# Altium PCB Controller V1.PcbDoc
Units mm, origin at the board's own origin, x right, y up, seen from the top; angles counter-clockwise.
Board outline 83.98 x 84 mm, 6 copper layers (TOP, 5V, VS, SIGNALS, GND, BOTTOM), stack 1.597 mm thick; 43 components, 112 nets, 302 pads, 3 vias.
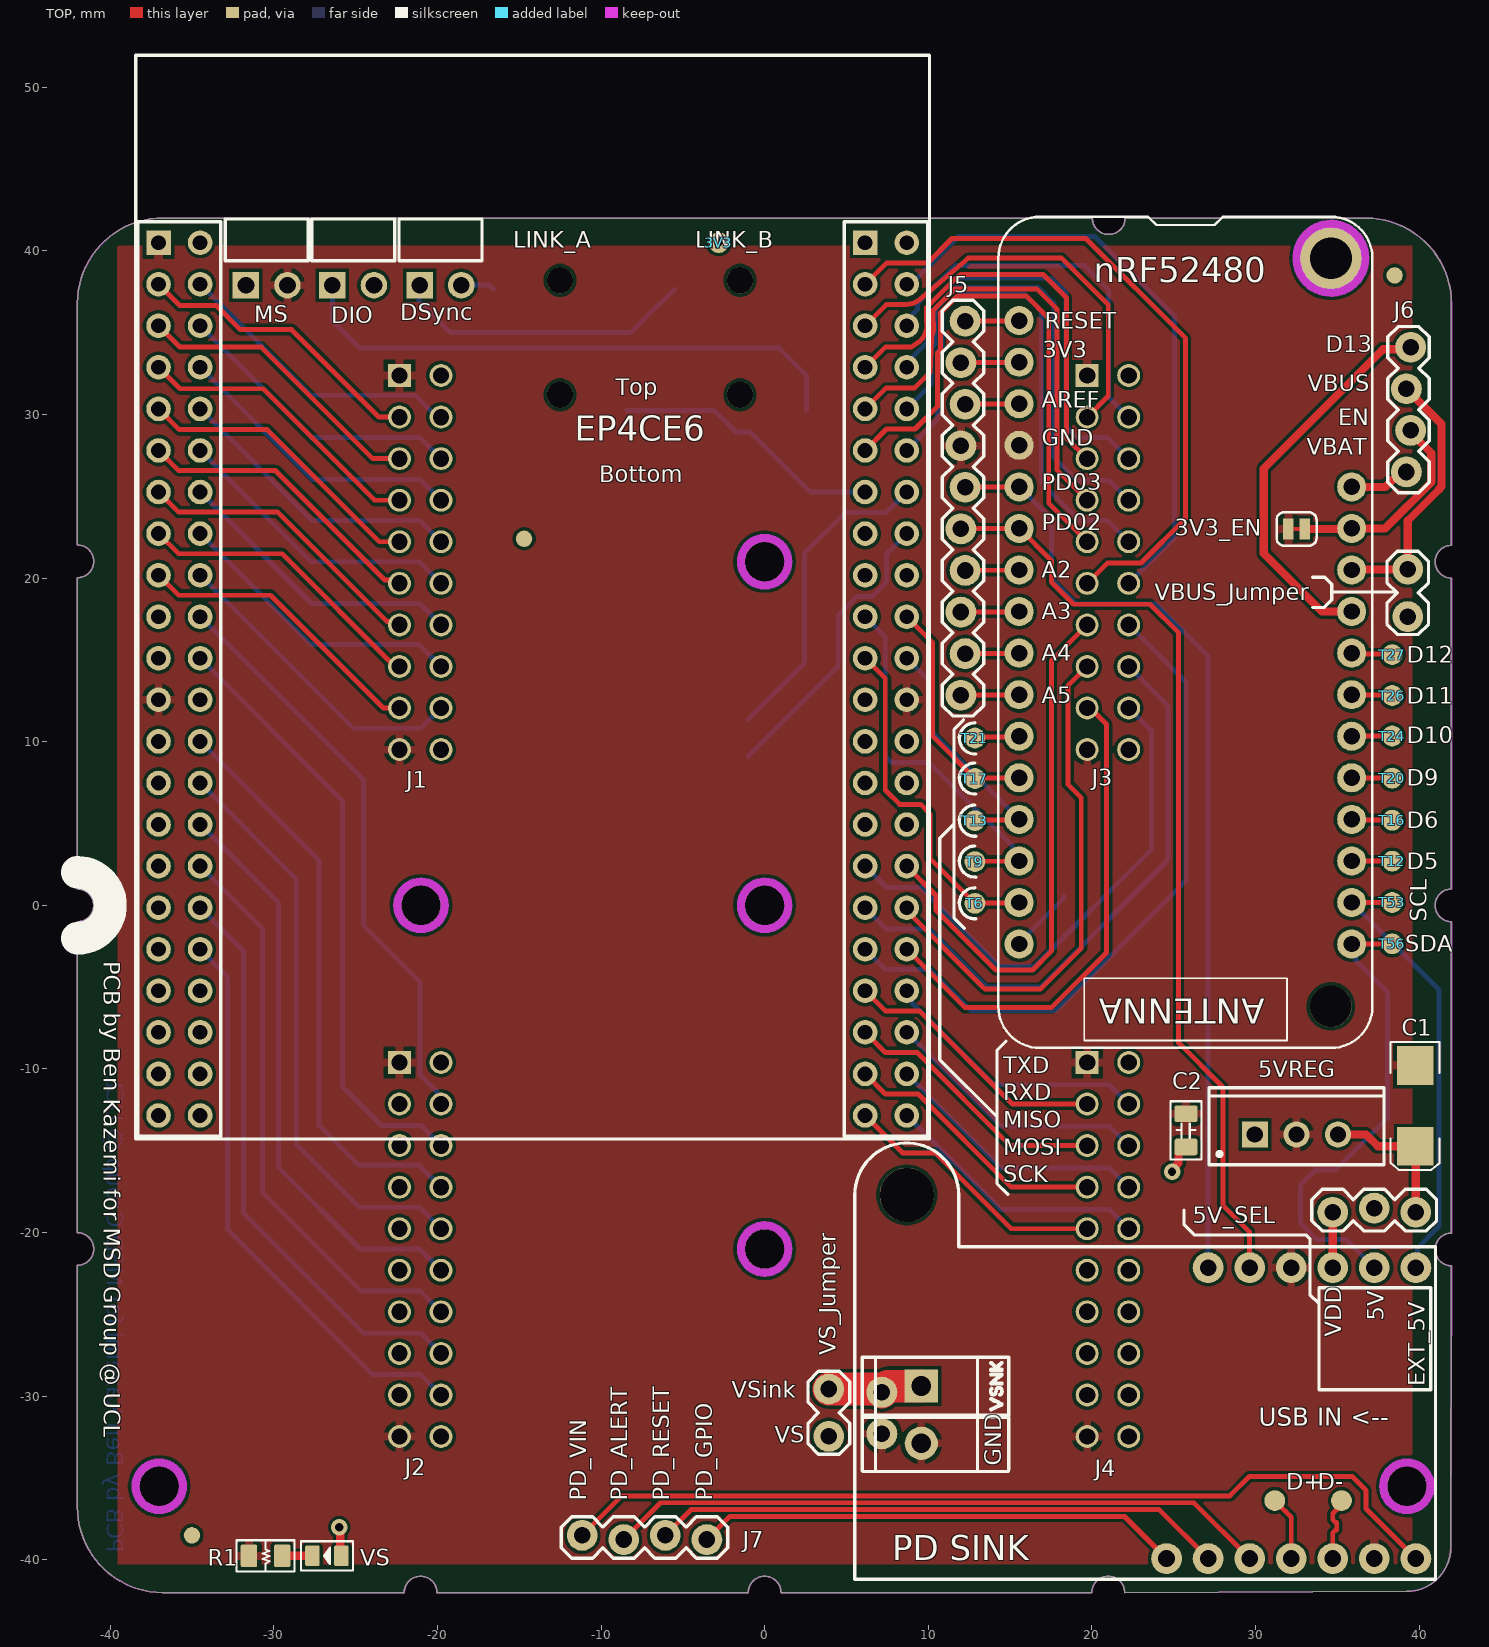
[diagram p0: TOP view]
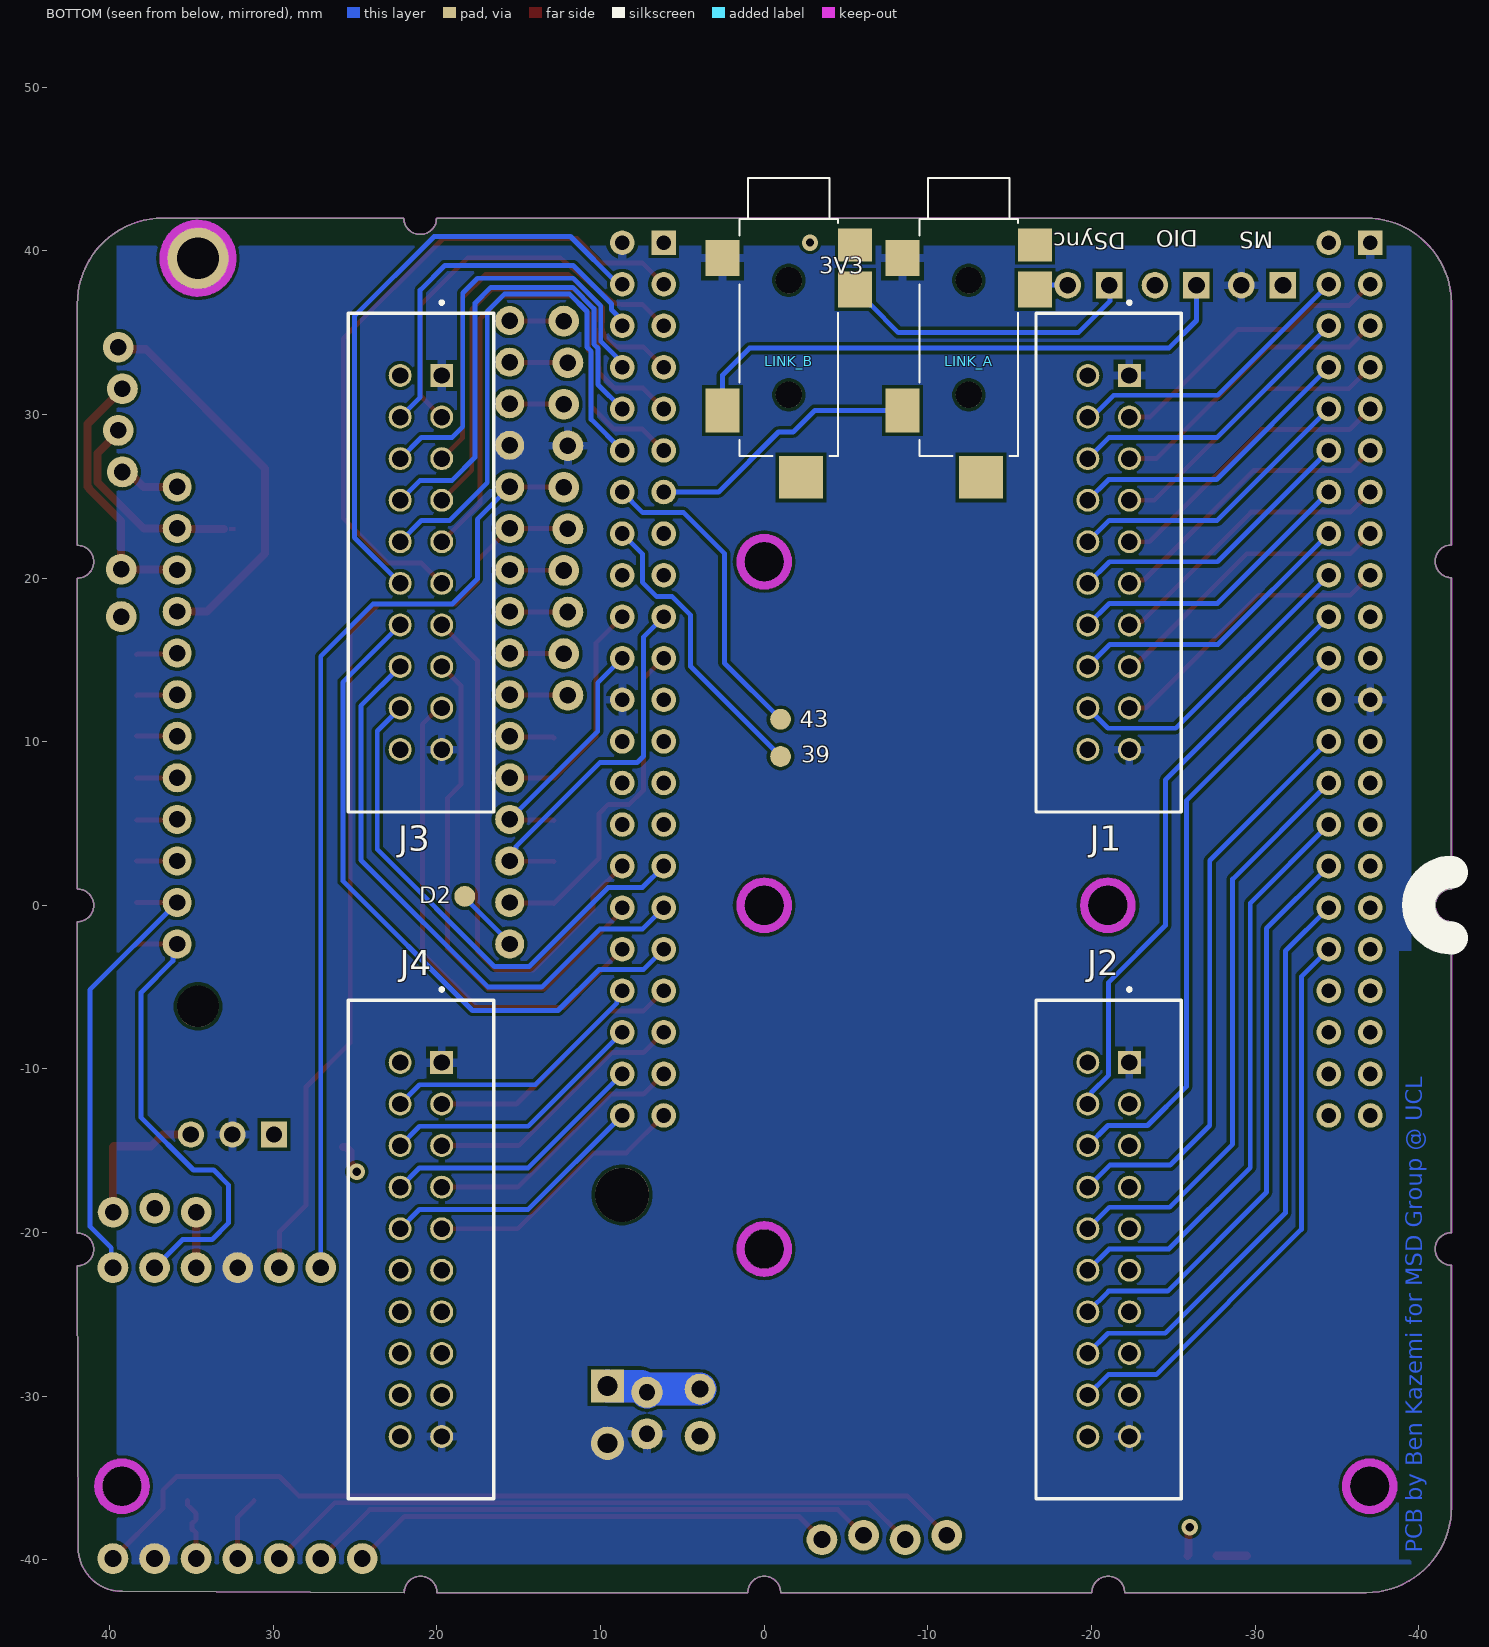
[diagram p1: BOTTOM view, seen from below]
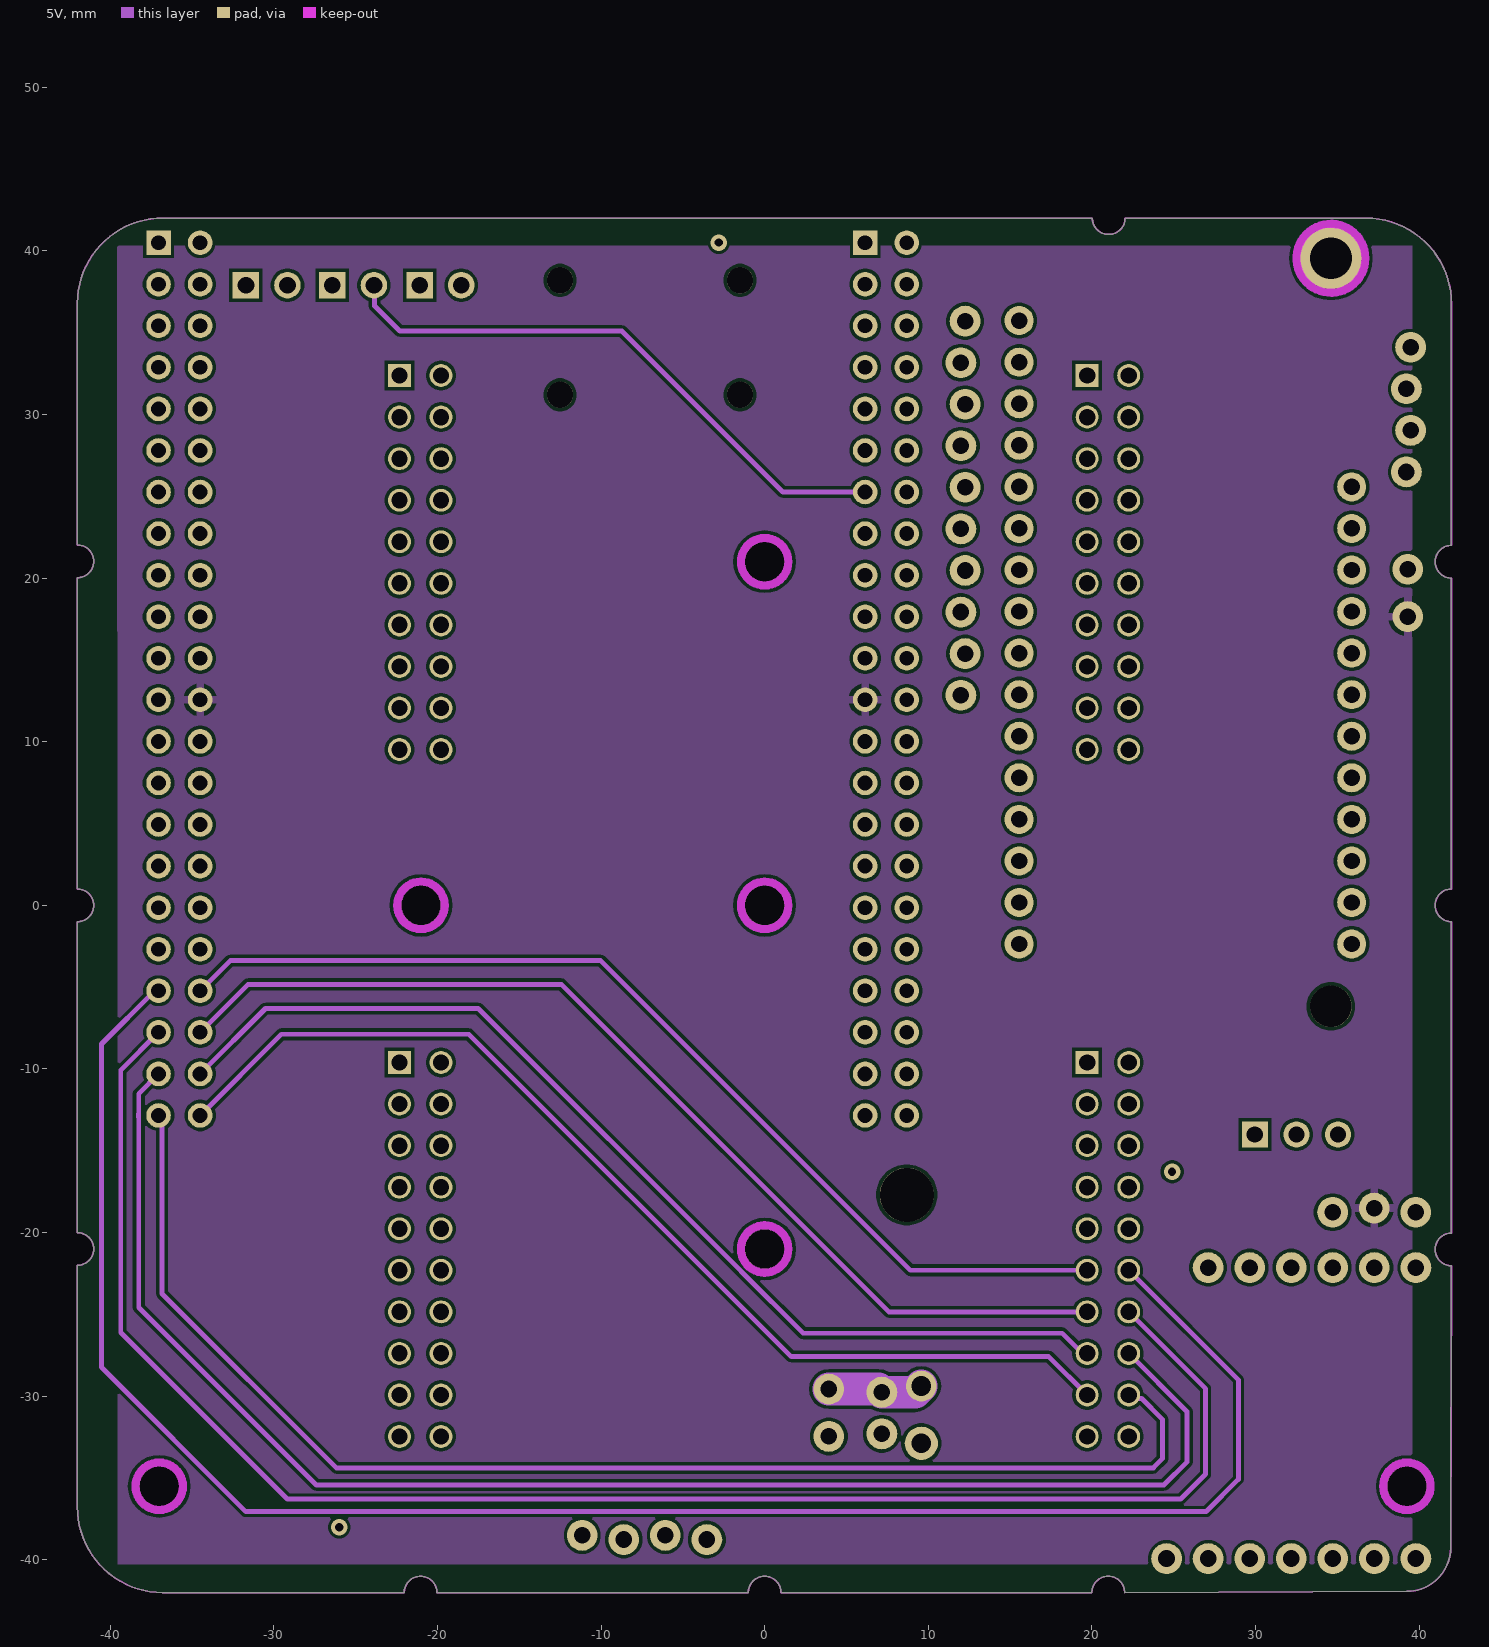
[diagram p2: 5V]
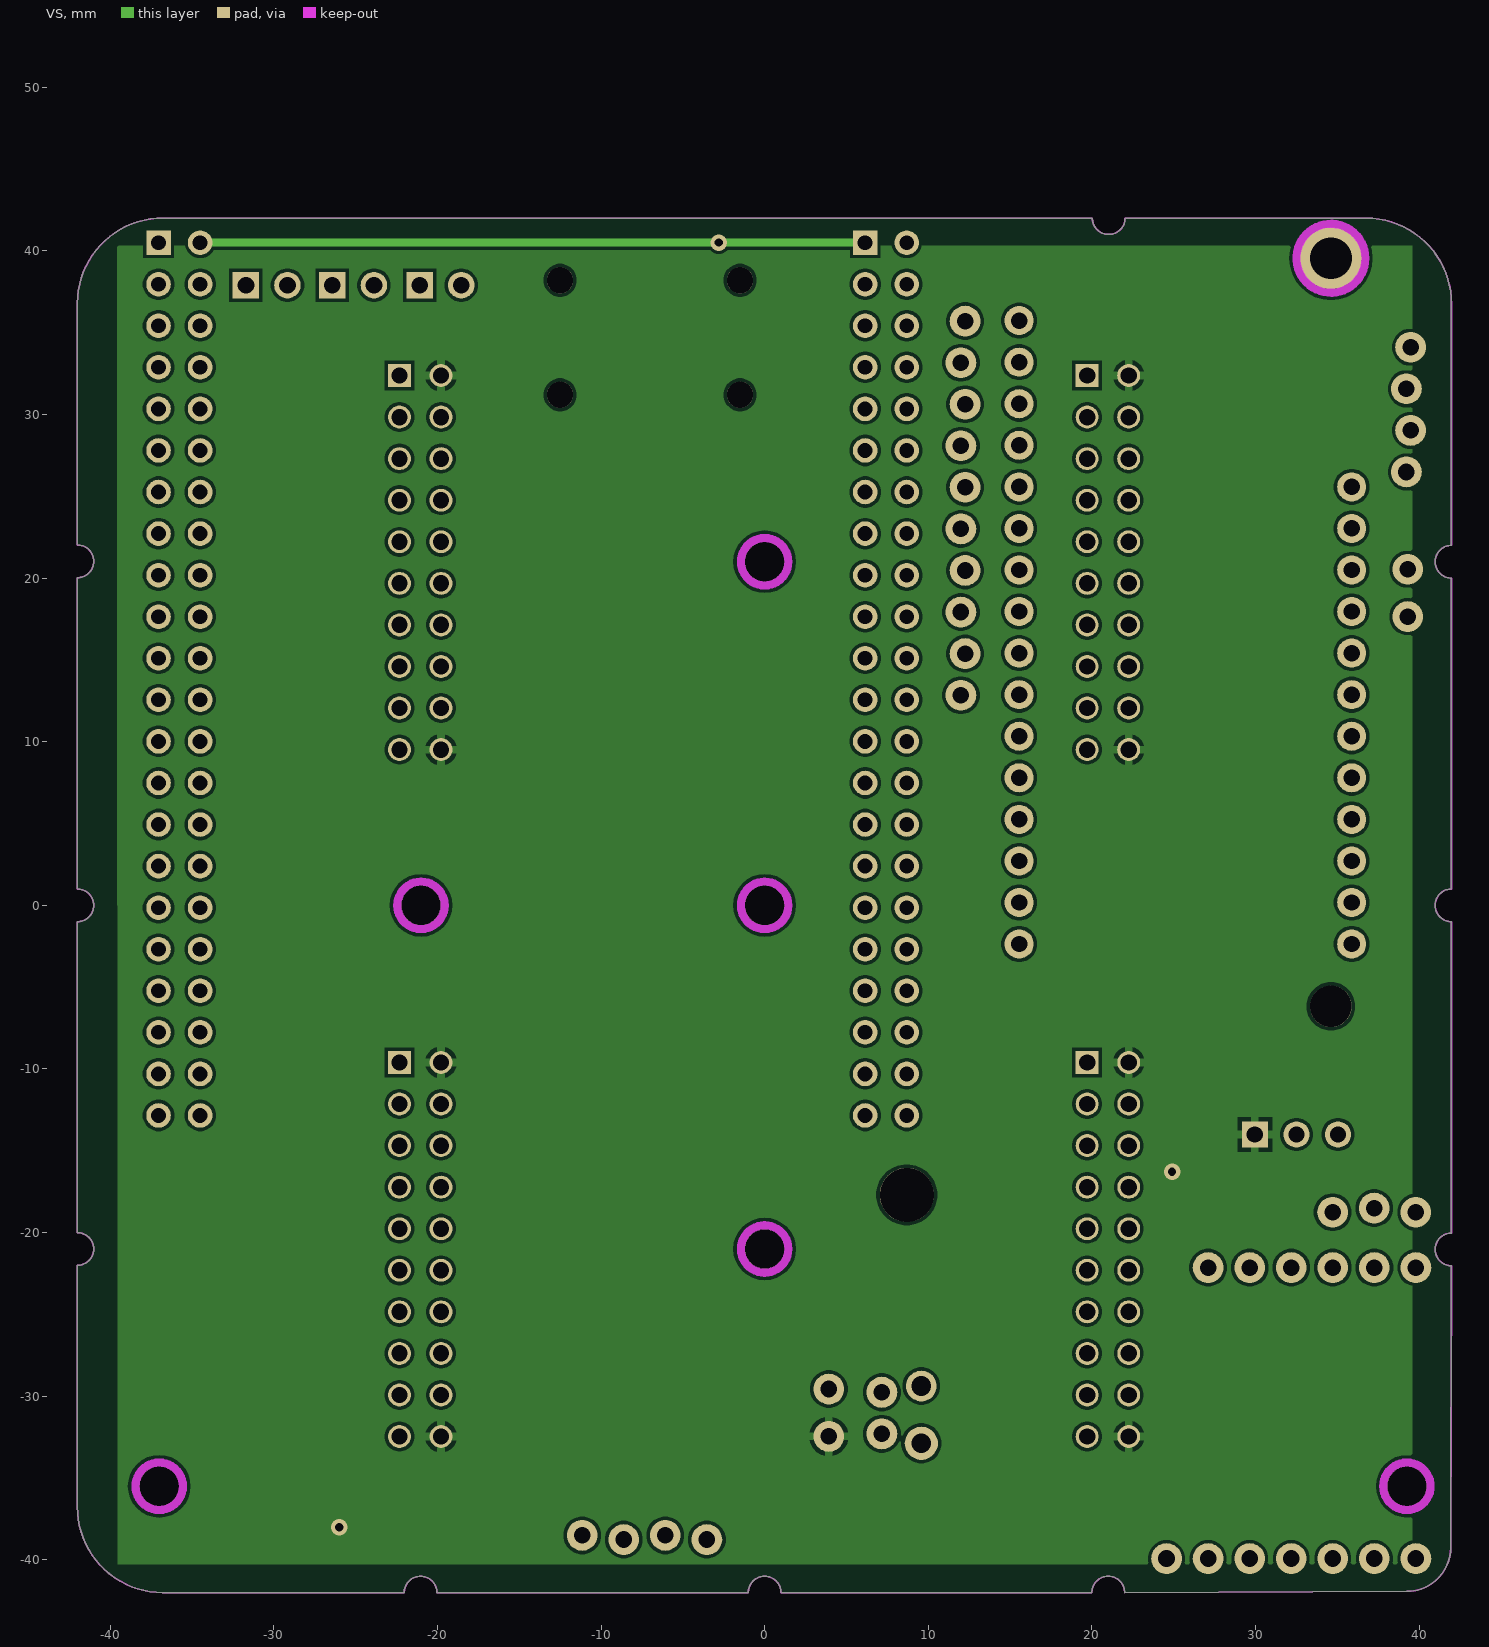
[diagram p3: VS]
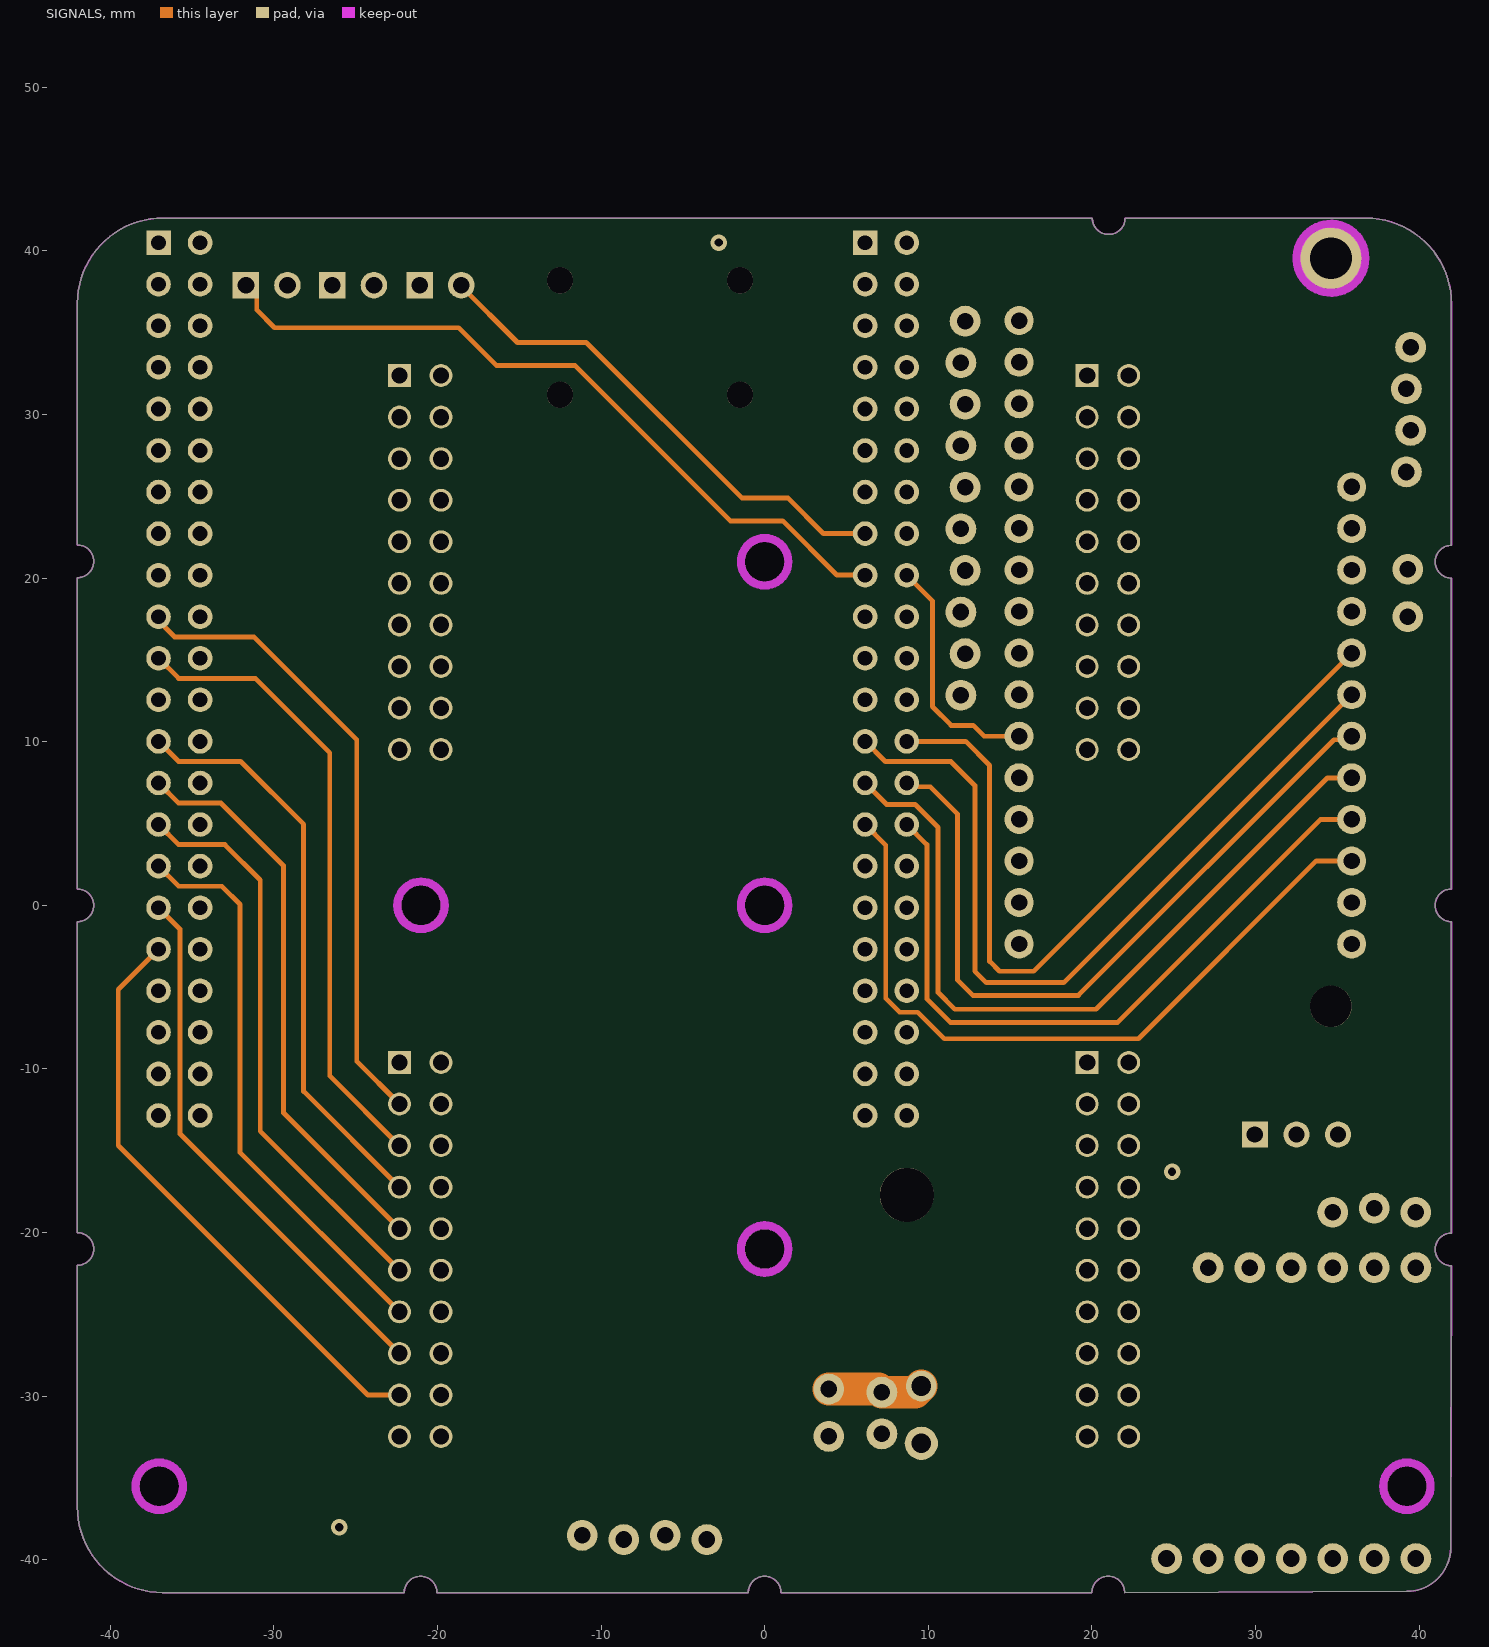
[diagram p4: SIGNALS]
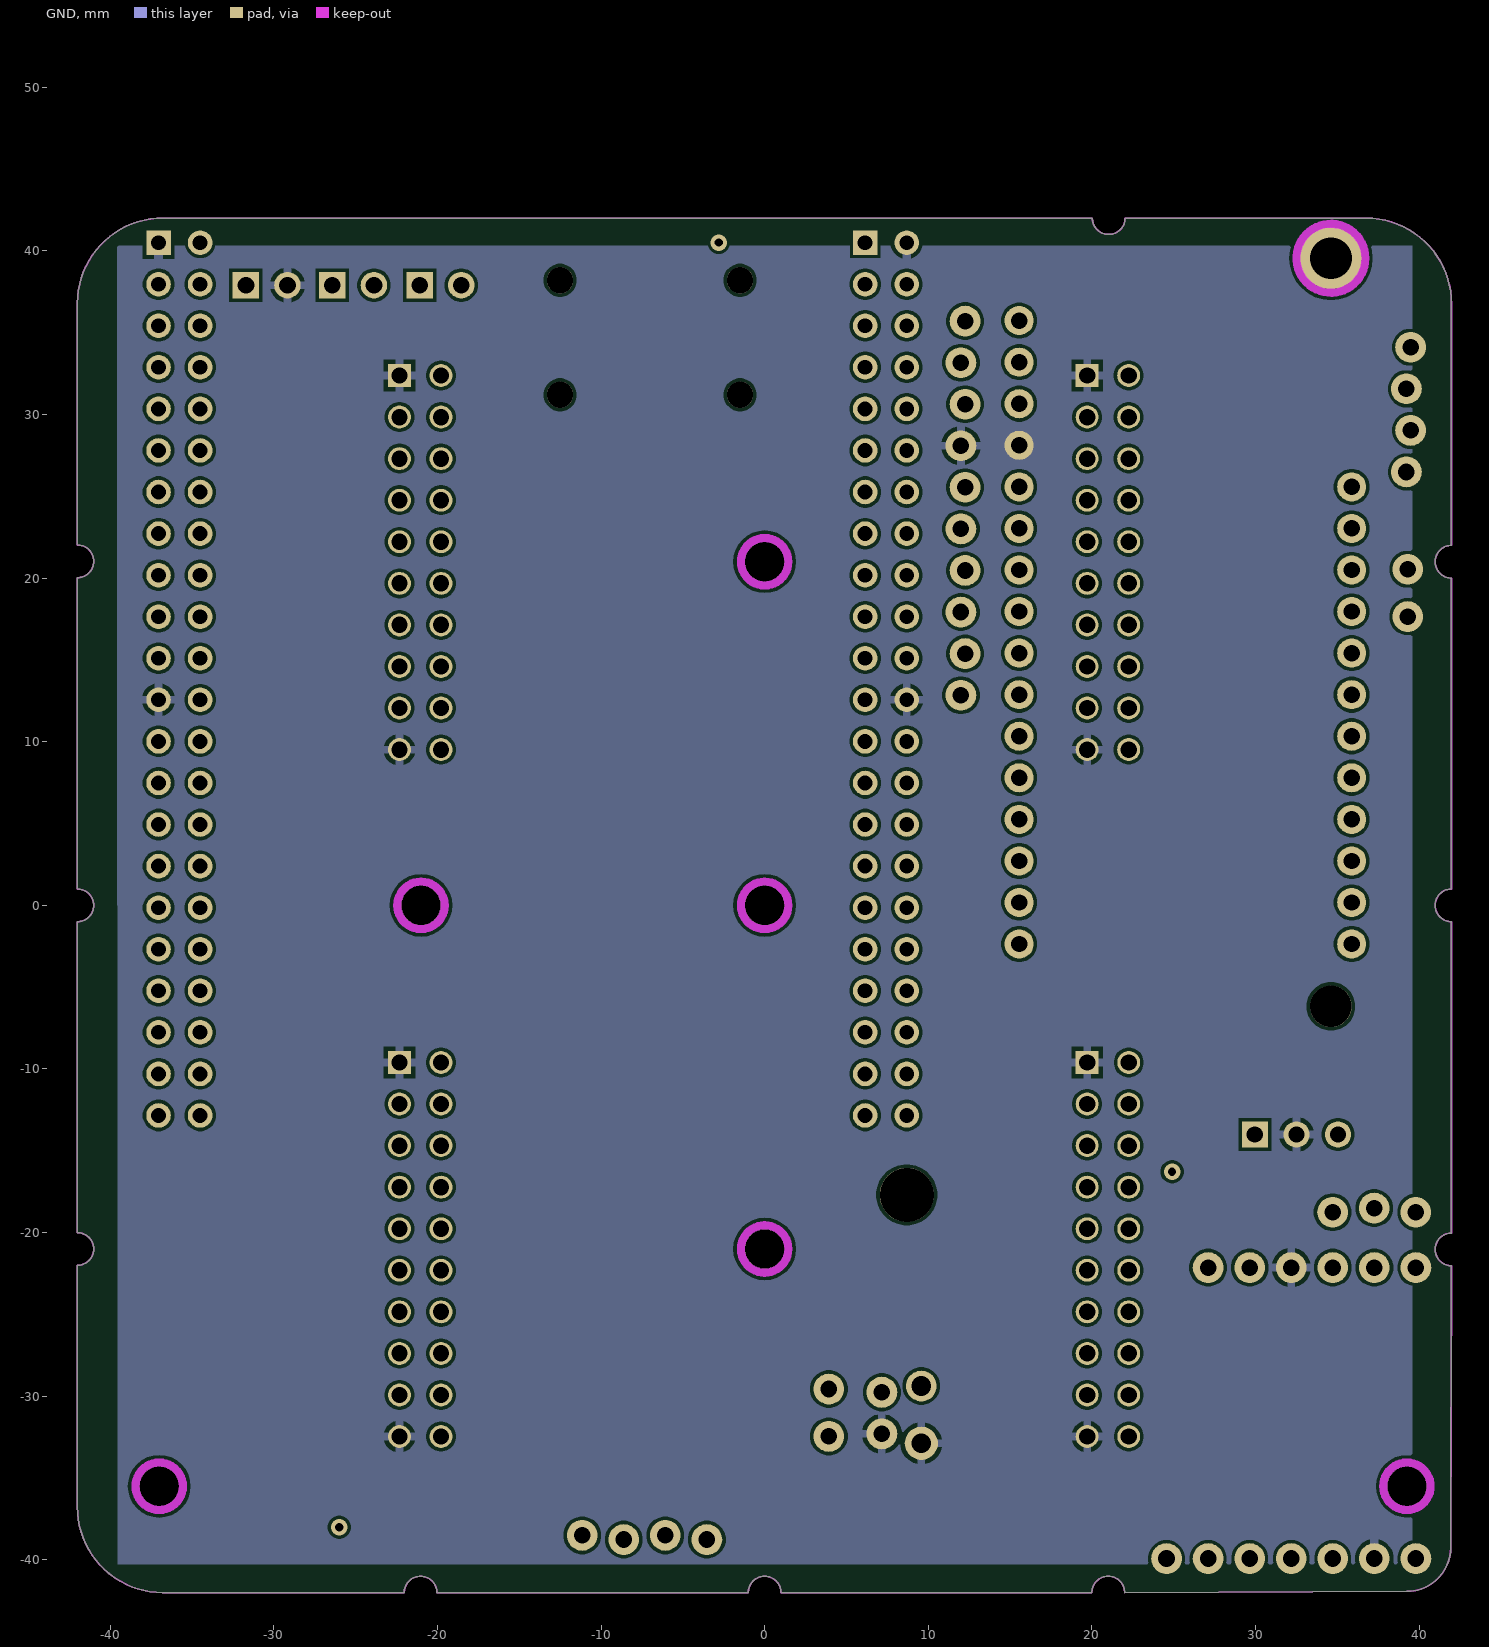
[diagram p5: GND]

## Layer stack, top to bottom
Top Mask: solder mask 0.015, Solder Resist, Dk 3.8
TOP: signal copper 0.035
Dielectric 1: prepreg 0.1, 2313, Dk 4.05
5V: signal copper 0.0175
Core 1: core 0.565, FR-4, Dk 4.5
VS: signal copper 0.0175
Dielectric 2: prepreg 0.127, 2116, Dk 4.25
SIGNALS: signal copper 0.0175
Core 2: core 0.565, FR-4, Dk 4.5
GND: signal copper 0.0175
Dielectric 3: prepreg 0.1, 2313, Dk 4.05
BOTTOM: signal copper 0.035
Bottom Mask: solder mask 0.015, Solder Resist, Dk 3.8

## Board outline
-42,-36.75 -42,-22 ccw(c-42,-21) -42,-20 -42,-1 ccw(c-42,0) -42,1 -42,20.025 ccw(c-42,21.025) -42,22.025 -42,36.775 -42,36.8 cw(c-36.775,36.775) -36.75,42 20.025,42 ccw(c21.025,42) 22.025,42 36.775,42 cw(c36.75,36.775) 41.975,36.75 41.975,22 ccw(c41.975,21) 41.975,20 41.975,1 ccw(c41.975,0) 41.975,-1 41.975,-20.025 ccw(c41.975,-21.025) 41.975,-22.025 41.927,-39.256 cw(c39.245,-39.243) 39.233,-41.925 22,-42 ccw(c21,-42) 20,-42 1,-42 ccw(c0,-42) -1,-42 -20.025,-42 ccw(c-21.025,-42) -22.025,-42 -36.775,-42 -36.8,-42 cw(c-36.775,-36.775)

## Design rules (kind name [scope] priority, off if disabled: settings)
BoardOutlineClearance [All] p1: gap=0.2 ignorepadtopadclearanceinfootprint=FALSE
Clearance [All] p1: gap=0.2 ignorepadtopadclearanceinfootprint=FALSE except(0.12: Arc-Arc Arc-Track Track-Track; 0.127: Arc-SMDPad Track-SMDPad SMDPad-SMDPad; 0.254: Arc-Via Arc-Text Track-Via Track-Text SMDPad-Via SMDPad-Text THPad-Via THPad-Text Via-Via Via-Text Fill-Text Poly-Text Region-Text Text-Text; 0.3: THPad-THPad; 0.33: Arc-THPad Track-THPad SMDPad-THPad)
HoleSize [All] p1: absolutevalues=TRUE maxlimit=6.3 minlimit=0.2 maxpercent=80.000 minpercent=20.000
MinimumAnnularRing [All] p1: minimumring=0.2
PlaneClearance [All] p1: clearance=0.5
PlaneConnect [All] p1: planeconnectstyle=Relief reliefexpansion=0.5 reliefentries=4 reliefconductorwidth=0.254 reliefairgap=0.254
PolygonConnect PolygonConnect_1 [All] p1: thpad.connectstyle=Relief thpad.reliefconductorwidth=0.5 thpad.reliefentries=4 thpad.polygonreliefangle="90 Angle" thpad.airgapwidth=0.254 smdpad.connectstyle=Relief smdpad.reliefconductorwidth=0.5 smdpad.reliefentries=4 smdpad.polygonreliefangle="90 Angle" smdpad.airgapwidth=0.254 via.connectstyle=Direct via.reliefconductorwidth=0.508 via.reliefentries=4 via.polygonreliefangle="90 Angle" via.airgapwidth=0.254
RoutingCorners [All] p1: cornerstyle=Round minsetback=2.54 maxsetback=2.54
RoutingVias [All] p1: holewidth=0.5 width=1 viastyle="Through Hole" minholewidth=0.2 minwidth=0.45 maxholewidth=1 maxwidth=2
SilkToSilkClearance [All] p1 off: silktosilkclearance=0.1
SilkToSolderMaskClearance [IsPad] p1 off: minsilkscreentomaskgap=0.1 clearancetoexposedcopper=TRUE
SolderMaskExpansion [All] p1: expansion=0.1 istentingtop=FALSE
Width [All] p1: maxlimit=2.54 minlimit=0.09 preferedwidth=0.3
24 further rules are at their usual default settings.

## Components (designator, comment, footprint, x,y, rotation, side; value= is the part's Value field where it differs from the comment)
3V3 "TEST-POINT3X5" PAD.03X.05 -2.8,40.5 r90 top
3V3_EN "Normally closed trace jumper    This jumper has a trace between two pads so it's normally closed (NC). Use a razor knife to open the connection. For best results follow the IPC guidelines for cutting traces: Cutout at least 0.063 mm (0.005 in).  Remove all loose material to clean up the cut area.  Seal the cut with an approved epoxy.       Reapply solder to reclose the connection." SMT-JUMPER_2_NC_TRACE_SILK 32.508,23 r0 top net-tie
5V_SEL "Jumper to short the 5V source" "1X03_LOCK - header" 39.79,-18.627 r180 top
5VREG "OKI-78SR-5" OOKA-78SR 32.5,-14 r0 top
39 "TEST-POINT3X5" PAD.03X.05 -1,9.1 r180 bottom
43 "TEST-POINT3X5" PAD.03X.05 -1,11.375 r180 bottom
C1 "GRM32ER71A476ME15L" EIA6032-NOM 39.75,-12.25 r270 top
C2 "0.33uF" CAP0805 25.75,-13.75 r180 top
D2 "TEST-POINT3X5" PAD.03X.05 18.3,0.55 r180 bottom
D+ "TEST-POINT3X5" PAD.03X.05 31.175,-36.375 r0 top
D- "TEST-POINT3X5" PAD.03X.05 35.25,-36.375 r0 top
DIO "TSW-102-09-G-S-RA" SAMTEC_TSW-102-09-G-S-RA -26.415,37.9 r180 top
DSync "TSW-102-09-G-S-RA" SAMTEC_TSW-102-09-G-S-RA -21.08,37.9 r180 top (schematic designator D_Sync)
EP4CE6 "Waveshare FPGA" "EP4CE6 WAVESHARE FPGA" -37.04,40.5 r270 top locked
J1 "TSSH-110-01-L-D" SAMTEC_TSSH-110-01-L-D -22.317,32.379 r270 bottom locked
J2 "TSSH-110-01-L-D" SAMTEC_TSSH-110-01-L-D -22.317,-9.601 r270 bottom
J3 "TSSH-110-01-L-D" SAMTEC_TSSH-110-01-L-D 19.708,32.379 r270 bottom locked
J4 "TSSH-110-01-L-D" SAMTEC_TSSH-110-01-L-D 19.71,-9.601 r270 bottom locked
J5 "" "1X10 _ LOCK - header" 12.123,35.705 r270 top
J6 "Pulled out pins" "1X04_LOCK - header" 39.348,26.485 r90 top
J7 "Pulled out pins" "1X04_LOCK - header" -3.53,-38.629 r180 top
LINK_A "35RASMT4BHNTRX" SWITCHCRAFT_35RASMT4BHNTRX -12.5,34.7 r270 bottom
LINK_B "35RASMT4BHNTRX" SWITCHCRAFT_35RASMT4BHNTRX -1.5,34.7 r270 bottom
MS "TSW-102-09-G-S-RA" SAMTEC_TSW-102-09-G-S-RA -31.7,37.9 r180 top
nRF52480 "Adafruit Feather nRF52480" "FEATHER BLE NRF52480" 16.825,39.545 r270 top
"PD SINK" "Sparkfun STUSB4500" "SPARKFUN STUSB4500" 39.801,-22.136 r180 top
R1 "3K BOURNS CRT0805-BY-3001ELF" RES-0805 -30.5,-39.75 r270 top
T6 "TEST-POINT3X5" PAD.03X.05 12.85,0.125 r90 top
T9 "TEST-POINT3X5" PAD.03X.05 12.85,2.675 r90 top
T12 "TEST-POINT3X5" PAD.03X.05 38.35,2.7 r180 top
T13 "TEST-POINT3X5" PAD.03X.05 12.85,5.175 r180 top
T16 "TEST-POINT3X5" PAD.03X.05 38.35,5.2 r180 top
T17 "TEST-POINT3X5" PAD.03X.05 12.85,7.75 r180 top
T20 "TEST-POINT3X5" PAD.03X.05 38.35,7.775 r180 top
T21 "TEST-POINT3X5" PAD.03X.05 12.85,10.225 r180 top
T24 "TEST-POINT3X5" PAD.03X.05 38.35,10.35 r180 top
T26 "TEST-POINT3X5" PAD.03X.05 38.35,12.825 r90 top
T27 "TEST-POINT3X5" PAD.03X.05 38.35,15.325 r180 top
T53 "TEST-POINT3X5" PAD.03X.05 38.35,0.175 r180 top
T56 "TEST-POINT3X5" PAD.03X.05 38.35,-2.35 r180 top
VBUS_Jumper "Short to connect  5V to VBUS of feather" 1X02_LOCK_ 39.3,17.825 r90 top
VS "Red WURTH 150080RS75000" "LED-0805 - RED" -26.75,-39.75 r180 top
VS_Jumper "Short to connect VS to Vsink, open to add filters" 1X02_LOCK_ 3.925,-29.735 r270 top

## Footprints (in the part's own frame and the unit in brackets; to place one, negate y for a bottom-side part, rotate by r counter-clockwise, add the part's x,y. Pads: shape width x height; smd on the part's side, far side on the other; paste and mask are expansions set on the pad)
1X02_LOCK_ [mil]
  round 74 hole 40: 1(-7,0) 2(107,0)
  silkscreen extent -50,-50 150,50, body extent -50,-49 150,49, height 241
"1X03_LOCK - header" [mil]
  round 74 hole 40: 1(0,5) 2(100,-5) 3(200,5)
  silkscreen extent -50,-50 250,50, body extent -50,-50 250,48, height 330
"1X04_LOCK - header" [mil]
  round 74 hole 40: 1(0,5) 2(100,-5) 3(200,5) 4(300,-5)
  silkscreen extent -50,-50 350,50, body extent -47,-51 353,47, height 122
"1X10 _ LOCK - header" [mil]
  round 74 hole 40: 1(0,5) 2(100,-5) 3(200,5) 4(300,-5) 5(400,5) 6(500,-5) 7(600,5) 8(700,-5) 9(800,5) 10(900,-5)
  silkscreen extent -50,-50 950,50, body extent -50,-48 950,50, height 330
CAP0805 [mil]
  rrect25% 55x40 smd: 1(0,40) 2(0,-40)
  silkscreen extent -38,-70 38,70, body extent -25,-39 25,39, height 49
EIA6032-NOM [mm]
  rect 2.37x2.23 smd: A(2.47,0) C(-2.47,0)
  silkscreen extent -3.91,-1.5 3.91,1.5, body extent -3.12,-1.6 3.07,1.61, height 2.22
"EP4CE6 WAVESHARE FPGA" [mm]
  rect 1.5x1.5 hole 0.9: 1(0,0) 45(0,43.18)
  round 1.5 hole 0.9: 2(0,2.54) 3(2.54,0) 4(2.54,2.54) 5(5.08,0) 6(5.08,2.54) 7(7.62,0) 8(7.62,2.54) 9(10.16,0) 10(10.16,2.54) 11(12.7,0) 12(12.7,2.54) 13(15.24,0) 14(15.24,2.54) 15(17.78,0) 16(17.78,2.54) 17(20.32,0) 18(20.32,2.54) 19(22.86,0) 20(22.86,2.54) 21(25.4,0) 22(25.4,2.54) 23(27.94,0) 24(27.94,2.54) 25(30.48,0) 26(30.48,2.54) 27(33.02,0) 28(33.02,2.54) 29(35.56,0) 30(35.56,2.54) 31(38.1,0) 32(38.1,2.54) 33(40.64,0) 34(40.64,2.54) 35(43.18,0) 36(43.18,2.54) 37(45.72,0) 38(45.72,2.54) 39(48.26,0) 40(48.26,2.54) 41(50.8,0) 42(50.8,2.54) 43(53.34,0) 44(53.34,2.54) 46(0,45.72) 47(2.54,43.18) 48(2.54,45.72) 49(5.08,43.18) 50(5.08,45.72) 51(7.62,43.18) 52(7.62,45.72) 53(10.16,43.18) 54(10.16,45.72) 55(12.7,43.18) 56(12.7,45.72) 57(15.24,43.18) 58(15.24,45.72) 59(17.78,43.18) 60(17.78,45.72) 61(20.32,43.18) 62(20.32,45.72) 63(22.86,43.18) 64(22.86,45.72) 65(25.4,43.18) 66(25.4,45.72) 67(27.94,43.18) 68(27.94,45.72) 69(30.48,43.18) 70(30.48,45.72) 71(33.02,43.18) 72(33.02,45.72) 73(35.56,43.18) 74(35.56,45.72) 75(38.1,43.18) 76(38.1,45.72) 77(40.64,43.18) 78(40.64,45.72) 79(43.18,43.18) 80(43.18,45.72) 81(45.72,43.18) 82(45.72,45.72) 83(48.26,43.18) 84(48.26,45.72) 85(50.8,43.18) 86(50.8,45.72) 87(53.34,43.18) 88(53.34,45.72)
  silkscreen extent -11.44,-1.39 54.78,47.11, body extent -1.35,-1.35 54.56,46.99, height 8.65
"FEATHER BLE NRF52480" [mil]
  round 70 hole 39.37: 1(150,-50) 2(250,-50) 3(350,-50) 4(450,-50) 5(550,-50) 6(650,-50) 7(750,-50) 8(850,-50) 9(950,-50) 10(1050,-50) 11(1150,-50) 12(1250,-50) 13(1350,-50) 14(1450,-50) 15(1550,-50) 16(1650,-50) 17(1650,750) 18(1550,750) 19(1450,750) 20(1350,750) 21(1250,750) 22(1150,750) 23(1050,750) 24(950,750) 25(850,750) 26(750,750) 27(650,750) 28(550,750)
  round 149.61 hole 100.39 unplated: 2(0,700)
  round 100 hole 100 unplated: MH1(1800,700)
  silkscreen extent -100,-100 1900,800, body extent 91,-95 1711,799, height 335
"LED-0805 - RED" [mil]
  rrect25% 35x50 smd: +(-35,0) -(35,0)
  silkscreen extent -63,-35 63,35, body extent -39,-25 39,25, height 16
OOKA-78SR [mm] "TO, Thru-Hole, Vertical, Heatsink Mounted; 3 In-Line Leads; Pitch 2.54 mm"
  round 1.6 hole 1: GND(0,0) OUT(2.54,0)
  rect 1.6x1.6 hole 1: IN(-2.54,0)
  silkscreen extent -5.35,-1.85 5.35,2.85, body extent -5.21,-2.79 5.21,4.94, height 16.58
PAD.03X.05 [mm]
  rrect100% 1.27x1.27 smd paste-0.635: P$1(0,0)
RES-0805 [mil]
  rrect25% 55x40 smd: 1(0,40) 2(0,-40)
  silkscreen extent -38,-70 38,70, body extent -24,-40 26,38, height 24
SAMTEC_TSSH-110-01-L-D [mm]
  rect 1.4x1.4 hole 1: 01(0,0)
  round 1.4 hole 1: 02(0,-2.54) 03(2.54,0) 04(2.54,-2.54) 05(5.08,0) 06(5.08,-2.54) 07(7.62,0) 08(7.62,-2.54) 09(10.16,0) 10(10.16,-2.54) 11(12.7,0) 12(12.7,-2.54) 13(15.24,0) 14(15.24,-2.54) 15(17.78,0) 16(17.78,-2.54) 17(20.32,0) 18(20.32,-2.54) 19(22.86,0) 20(22.86,-2.54)
  silkscreen extent -4.56,-5.72 26.67,3.18, body extent -3.81,-5.72 26.67,3.18, height 8.89
SAMTEC_TSW-102-09-G-S-RA [mm]
  rect 1.62x1.62 hole 1.02: 01(0,0)
  round 1.62 hole 1.02: 02(-2.54,0)
  silkscreen extent -3.81,-4.04 1.27,-1.5, body extent -3.81,-9.91 1.27,0.32, height 3.27
SMT-JUMPER_2_NC_TRACE_SILK [mil]
  rect 25x50 smd paste-25: 1(-20,0) 2(20,0)
  TOP region: -8,-5 8,-5 8,5 -8,5
  silkscreen extent -48,-40 48,40
"SPARKFUN STUSB4500" [mil]
  round 74 hole 40: 1(0,0) 2(100,0) 3(200,0) 4(300,0) 5(400,0) 6(500,0) 7(0,700) 8(100,700) 9(200,700) 10(300,700) 11(400,700) 12(500,700) 13(600,700)
  round 80 hole 47.24: 8(1190,422.8)
  round 74.8 hole 39.37: 8(1285,400) 14(1285,300)
  rect 80x80 / inner round 73.91 / far side rect 80x80 hole 47.24: 14(1190,285)
  round 130 hole 130 unplated: MH1(1225,-175)
  silkscreen extent -47,-300 1350,750, body extent -60,-45 1333,747, height 335
SWITCHCRAFT_35RASMT4BHNTRX [mm]
  rect 2.2x2.1 smd: 1(-4.85,-4.05) 2(-2.95,4.05)
  rect 2.7x2.1 smd: 3(4.45,-4.05)
  rect 2x2.1 smd: 4(-5.65,4.05)
  rect 2.6x2.7 smd: 5(8.55,0.75)
  round 1.6 hole 1.6 unplated: ""(-3.5,0) ""(3.5,0)
  silkscreen extent -9.75,-3 7.25,3, body extent -9.5,-4.5 9.5,4.5, height 5.05

## Part data
3V3_EN: library part JUMPER-SMT_2_NC_TRACE_SILK
5V_SEL: library part CONN_03LOCK
5VREG: library part "Volt Reg", "Voltage Regulator", Datasheet=http://www.farnell.com/datasheets/1904473.pdf?_ga=2.85272922.296638663.1549285494-96194751.1546862067, LatestRevisionDate=29-May-2009, LatestRevisionNote="IPC-7351 Footprint Added.", PackageDescription="3-Pin Transistor Outline Package 2.54 mm Pitch, 15.1 mm Lead Span", PackageReference=D2PAK, Published=24-Mar-1999, Publisher="Altium Limited"
C1: library part "CAP ELECTRO", PROD_ID=CAP-09538
C2: library part "CAP CERAMIC", PROD_ID=CAP-08280
DIO DSync J1 J2 J3 J4 MS: Package=None, Price=None
  DIO DSync MS: Availability=Unavailable, MF="{'manufacturer': u'Samtec Inc.'}", MP=TSW-102-09-G-S-RA
  J1 J2 J3 J4: MP=TSSH-110-01-L-D, System=Connector
EP4CE6: library part EP4CE6, Package=None, Availability=Unavailable, MF="{'manufacturer': u'TE Connectivity'}", MP=7-534206-2, Price=None
J5: library part CONN_10LOCK_1
J6 J7: library part CONN_04LOCK, PROD_ID=CONN-09696
LINK_A LINK_B: "Conn 3.5MM Stereo Jack F 3 POS Solder RA SMD 5 Terminal 1 Port T/R", Package=None, Availability=Unavailable, MF="{'manufacturer': u'Switchcraft'}", MP=35RASMT4BHNTRX, Price=None
nRF52480: library part FEATHERWING_NODIM, DeviceName=_NODIM, DeviceSetName=FEATHERWING, GateName_1=G$1, LibraryName=microbuilder, SymbolName_1=MICROSHIELD
"PD SINK": library part "Sparkfun STUSB"
R1: library part RESISTOR, MPN=CRCW0603470RFKEA, Package=0603, MF=Vishay, OC_MOUSER=71-CRCW0603-470-E3, TYPE=Resistor
VBUS_Jumper VS_Jumper: library part "Header 2", "Header, 2-Pin", LatestRevisionDate=17-Jul-2002, LatestRevisionNote="Re-released for DXP Platform.", Publisher="Altium Limited"
VS: library part LED, Package=0805, Datasheet=https://docs-emea.rs-online.com/webdocs/1302/0900766b81302e21.pdf

## Free pads (board coordinates)
  round 2.4 hole 2.4 unplated mask+0: 0(-37,-35.5) 0(-21,0) 0(0,-21) 0(0,0) 0(0,21) 0(39.25,-35.5)
  round 1 smd paste+0 mask+0.5: 1(-35,-38.5) 1(-14.7,22.4) 1(38.5,38.5)

## Via types
v1: diameter 1, hole 0.5, TOP to BOTTOM, 2 vias
v2: diameter 1, hole 0.5, TOP to BOTTOM, tented both sides, 1 vias

## Nets (pads, with @x,y where several pads share a name; then routed paths per layer and width w, separated by ;. In a path a pad name is that pad's centre, name@x,y a point inside that pad or via, vN(x,y) a via of type N, cw(c..) or ccw(c..) an arc to the next point about the centre after c; other vN are vias at no path point)
3.3V: 3V3.P$1 EP4CE6.2 EP4CE6.45 | length 40.6
  VS w0.5: EP4CE6.2 EP4CE6.45
  other v2: -2.8,40.5
5V: 5V_SEL.2 EP4CE6.24 EP4CE6.67 VBUS_Jumper.1
A2: J5.7 nRF52480.7 | length 3.3
  TOP w0.3: J5.7 12.265,20.48 15.54,20.48 nRF52480.7
A3: J5.8 nRF52480.8 | length 3.6
  TOP w0.3: J5.8 12.011,17.94 15.54,17.94 nRF52480.8
A4: J5.9 nRF52480.9 | length 3.3
  TOP w0.3: J5.9 12.265,15.4 15.54,15.4 nRF52480.9
A5: J5.10 nRF52480.10 | length 3.6
  TOP w0.3: J5.10 12.011,12.86 15.54,12.86 nRF52480.10
D2: D2.P$1 nRF52480.16 | length 4.1
  BOTTOM w0.3: nRF52480.16 15.555,-2.28 18.3,0.465 D2.P$1
D5: EP4CE6.73 nRF52480.19 T12.P$1 | length 47.6
  TOP w0.3: nRF52480.19 35.883,2.708 38.343,2.708 T12.P$1
  SIGNALS w0.3: EP4CE6.73 7.4,3.68 7.4,-5.679 8.251,-6.53 9.355,-6.53 10.975,-8.15 22.85,-8.15 33.715,2.715 nRF52480.19
D6: EP4CE6.74 nRF52480.20 T16.P$1 | length 45.4
  TOP w0.3: nRF52480.20 35.903,5.228 38.323,5.228 T16.P$1
  SIGNALS w0.3: EP4CE6.74 9.91,3.71 9.91,-5.71 11.35,-7.15 21.575,-7.15 33.98,5.255 nRF52480.20
D9: EP4CE6.71 nRF52480.21 T20.P$1 | length 49.7
  TOP w0.3: nRF52480.21 35.885,7.785 38.34,7.785 T20.P$1
  SIGNALS w0.3: EP4CE6.71 7.45,6.17 9.189,6.17 10.6,4.759 10.6,-5.325 11.625,-6.35 20.25,-6.35 34.395,7.795 nRF52480.21
D10: EP4CE6.72 nRF52480.22 T24.P$1 | length 47.6
  TOP w0.3: nRF52480.22 35.882,10.342 38.343,10.342 T24.P$1
  SIGNALS w0.3: EP4CE6.72 8.91,7.25 10.125,7.25 11.775,5.6 11.775,-4.55 12.725,-5.5 19.175,-5.5 34.796,10.121 35.661,10.121 nRF52480.22
D11: EP4CE6.69 nRF52480.23 T26.P$1 | length 52.3
  TOP w0.3: nRF52480.23 35.9,12.85 38.325,12.85 T26.P$1
  SIGNALS w0.3: EP4CE6.69 7.37,8.79 11.385,8.79 12.85,7.325 12.85,-4.025 13.55,-4.725 18.275,-4.725 nRF52480.23
D12: EP4CE6.70 nRF52480.24 T27.P$1 | length 50.6
  TOP w0.3: nRF52480.24 35.92,15.37 38.305,15.37 T27.P$1
  SIGNALS w0.3: EP4CE6.70 12.28,10.02 13.75,8.55 13.75,-3.425 14.35,-4.025 16.435,-4.025 nRF52480.24
D13: J6.4 nRF52480.25 | length 24.1
  TOP w0.5: nRF52480.25 34.045,17.955 30.5,21.5 30.5,26.7 37.785,33.985 39.355,33.985 J6.4
EXT_5V: 5V_SEL.1 5VREG.OUT C1.A | length 9.1
  TOP w0.5: 5VREG.OUT 36.751,-14 37.471,-14.72 C1.A 39.79,-14.76 5V_SEL.1
Feather_3V3: J5.2 nRF52480.2@15.555,33.195 | length 3.6
  TOP w0.3: J5.2 12.011,33.18 15.54,33.18 nRF52480.2@15.555,33.195
Feather_AREF: J5.3 nRF52480.3 | length 3.3
  TOP w0.3: J5.3 12.265,30.64 15.54,30.64 nRF52480.3
Feather_EN: 3V3_EN.2 J6.2 nRF52480.27 | length 12.6
  TOP w0.5: 3V3_EN.2 35.84,23 nRF52480.27 37.92,23.035 40.741,25.855 40.741,27.629 39.475,28.895 J6.2
Feather_RESET: J5.1 nRF52480.1 | length 3.3
  TOP w0.3: J5.1 12.265,35.72 15.54,35.72 nRF52480.1
GND: 3V3_EN.1 5VREG.GND "PD SINK.4" "PD SINK.8" C1.C C2.2 EP4CE6.1 EP4CE6.23 EP4CE6.46 EP4CE6.68 J1.01 J1.19 J2.01 J2.19 J3.01 J3.19 J4.01 J4.19 J5.4 LINK_A.1 LINK_B.1 MS.02 nRF52480.4 R1.2
IO_39: 39.P$1 EP4CE6.60 | length 18.2
  BOTTOM w0.3: 39.P$1 4.5,14.6 4.5,17.739 5.631,18.87 6.569,18.87 7.45,19.751 7.45,21.49 EP4CE6.60
IO_42: DIO.02 EP4CE6.57 LINK_A.3 | length 52.6
  5V w0.3: DIO.02 -23.84,37.865 -23.84,36.64 -22.3,35.1 -8.725,35.1 1.115,25.26 EP4CE6.57
  BOTTOM w0.3: LINK_A.3 -3.1,30.25 -1.775,28.925 -0.875,28.925 2.79,25.26 EP4CE6.57
IO_43: 43.P$1 EP4CE6.58 | length 19.4
  BOTTOM w0.3: 43.P$1 2.438,14.813 2.438,21.513 4.925,24 7.42,24 EP4CE6.58
MISO: EP4CE6.66 nRF52480.13 T13.P$1 | length 15.4
  TOP w0.3: T13.P$1 12.89,5.215 15.515,5.215 nRF52480.13
  BOTTOM w0.3: EP4CE6.66 10.175,13.605 10.175,10.635 nRF52480.13
MOSI: EP4CE6.64 nRF52480.12 T17.P$1 | length 14.3
  TOP w0.3: EP4CE6.64 10.275,16.045 10.275,10.325 12.828,7.772 15.532,7.772 nRF52480.12
MS: EP4CE6.61 MS.01 | length 45.7
  SIGNALS w0.3: MS.01 -31.04,37.24 -31.04,36.39 -29.95,35.3 -18.7,35.3 -16.4,33 -11.6,33 -2.1,23.5 1.1,23.5 4.42,20.18 EP4CE6.61
NetR1_1: R1.1 VS.- | length 1.8
  TOP w0.5: R1.1 VS.-
Passthrough'd_IO42: DIO.01 LINK_B.3 | length 34.7
  BOTTOM w0.3: DIO.01 -26.415,35.74 -24.725,34.05 0.9,34.05 2.55,32.4 LINK_B.3
Passthrough'd_Sync: DSync.01 LINK_B.2 | length 18.5
  BOTTOM w0.3: DSync.01@-21.14,37.9 -21.14,36.94 -19.2,35 -8.2,35 -6.5,36.7 -6.45,36.7 -5.55,37.6 LINK_B.2
PD_A\L\E\R\T\: "PD SINK.11" J7.3 | length 40.6
  TOP w0.3: J7.3 -6.364,-36.51 26.235,-36.51 29.641,-39.916
PD_D+: "PD SINK.10" D+.P$1 | length 4
  TOP w0.3: D+.P$1 31.85,-37.05 32.181,-37.381 32.181,-38.95 32.181,-39.916
PD_D-: "PD SINK.9" D-.P$1 | length 4
  TOP w0.3: 34.721,-39.916 34.721,-38.95 34.721,-38.35 34.897,-38.174 34.938,-38.174 34.961,-38.152 34.961,-37.747 34.938,-37.724 34.897,-37.724 34.721,-37.549 34.721,-37.166 34.973,-36.914 35.25,-36.637 D-.P$1
PD_G\P\I\O\: "PD SINK.13" J7.1 | length 29.7
  TOP w0.3: J7.1 -2.124,-37.35 21.995,-37.35 24.561,-39.916
PD_RESET: "PD SINK.12" J7.2 | length 35.1
  TOP w0.3: J7.2 -4.498,-36.93 24.115,-36.93 27.101,-39.916
PD_VIN: "PD SINK.7" J7.4 | length 55.2
  TOP w0.3: J7.4 -8.738,-36.09 28.435,-36.09 29.625,-34.9 35.9,-34.9 36.75,-35.75 36.75,-36.865 39.801,-39.916
PDO2: "PD SINK.5" J5.6 nRF52480.6 | length 57.3
  TOP w0.3: J5.6 12.011,23.02 15.54,23.02 nRF52480.6 17.532,21.058 17.532,19.743 18.875,18.4 23.55,18.4 25.3,16.65 25.3,-8.4 28,-11.1 28,-18.325 29.625,-19.95 29.633,-19.958 29.633,-22.128 29.641,-22.136
PDO3: "PD SINK.6" J5.5 nRF52480.5 | length 58.7
  TOP w0.3: J5.5 12.265,25.56 15.54,25.56 nRF52480.5 ; 27.088,-22.123 27.101,-22.136
  BOTTOM w0.3: nRF52480.5 17.532,23.598 17.532,19.943 19.05,18.425 23.9,18.425 27.101,15.224 27.101,-22.136
RXD: EP4CE6.63 nRF52480.14 T9.P$1 | length 22.9
  TOP w0.3: T9.P$1 12.87,2.695 15.535,2.695 nRF52480.14
  BOTTOM w0.3: EP4CE6.63 7.37,16.41 7.37,9.13 7.775,8.725 10.05,8.725 15.161,3.614 15.161,3.509 15.555,3.115 nRF52480.14
SCK: EP4CE6.62 nRF52480.11 T21.P$1 | length 17.5
  TOP w0.3: T21.P$1 12.905,10.28 15.5,10.28 nRF52480.11
  SIGNALS w0.3: EP4CE6.62 10.25,18.61 10.25,12.15 11.4,11 12.75,11 13.415,10.335 nRF52480.11
SCL: "PD SINK.1" nRF52480.18 T53.P$1 | length 27.6
  TOP w0.3: nRF52480.18 T53.P$1
  BOTTOM w0.3: nRF52480.18 41.21,-5.16 41.21,-19.615 39.903,-20.922 39.903,-22.034 39.801,-22.136
SDA: "PD SINK.2" nRF52480.17 T56.P$1 | length 29
  TOP w0.3: nRF52480.17 35.883,-2.357 38.343,-2.357 T56.P$1
  BOTTOM w0.3: nRF52480.17 36.142,-2.632 36.142,-3.392 38.075,-5.325 38.075,-12.975 34.875,-16.175 33.65,-16.175 32.75,-17.075 32.75,-19.425 33.75,-20.425 35.55,-20.425 37.261,-22.136
sigA1: EP4CE6.35 J2.17 | length 36.5
  SIGNALS w0.3: EP4CE6.35 -39.5,-5.14 -39.5,-14.675 -24.254,-29.921 J2.17
sigA2: EP4CE6.34 J2.16 | length 35.4
  BOTTOM w0.3: EP4CE6.34 -31.85,-2.79 -31.85,-18.798 -24.498,-26.15 -21.008,-26.15 J2.16
sigA3: EP4CE6.44 J4.17 | length 65.4
  5V w0.3: EP4CE6.44 -29.535,-7.875 -18.075,-7.875 1.625,-27.575 17.364,-27.575 J4.17
sigA4: EP4CE6.41 J4.16 | length 92
  5V w0.3: EP4CE6.41 -38.25,-11.51 -38.25,-12.619 ccw(c-37.04,-12.84) -38.25,-13.061 -38.25,-24.575 -27.4,-35.425 24.4,-35.425 25.8,-34.025 25.8,-30.931 J4.16
sigA5: EP4CE6.31 J2.13 | length 34.9
  SIGNALS w0.3: EP4CE6.31 -35.81,1.17 -33.17,1.17 -32.05,0.05 -32.05,-15.108 J2.13
sigA6: EP4CE6.30 J2.12 | length 35.5
  BOTTOM w0.3: EP4CE6.30 -29.7,0.14 -29.7,-16.025 -24.725,-21 -21.078,-21 J2.12
sigA7: EP4CE6.40 J4.13 | length 63.7
  5V w0.3: EP4CE6.40 -31.565,-4.825 -12.425,-4.825 7.591,-24.841 J4.13
sigA8: EP4CE6.37 J4.12 | length 114.1
  5V w0.3: EP4CE6.37 -37.27,-5.22 -40.525,-8.475 -40.525,-28.225 -31.7,-37.05 26.975,-37.05 28.95,-35.075 28.95,-29.001 J4.12
sigA9: EP4CE6.27 J2.09 | length 34.9
  SIGNALS w0.3: EP4CE6.27 -35.81,6.25 -33.225,6.25 -29.4,2.425 -29.4,-12.678 J2.09
sigA10: EP4CE6.26 J2.08 | length 35.5
  BOTTOM w0.3: EP4CE6.26 -27.225,2.745 -27.225,-13.45 -24.8,-15.875 -21.123,-15.875 J2.08
sigA11: EP4CE6.87 J4.09 | length 16.4
  TOP w0.3: EP4CE6.87 8.425,-15.125 10.425,-15.125 15.061,-19.761 J4.09
sigA12: EP4CE6.86 J4.08 | length 16.4
  BOTTOM w0.3: EP4CE6.86 14.421,-16.041 21.07,-16.041 J4.08
sigA13: EP4CE6.21 J2.05 | length 38.6
  SIGNALS w0.3: EP4CE6.21 -35.81,13.87 -31.12,13.87 -26.575,9.325 -26.575,-10.423 J2.05
sigA14: EP4CE6.20 J2.04 | length 35.9
  BOTTOM w0.3: EP4CE6.20 -24.525,7.665 -24.525,-1.225 -21.05,-4.7 -21.05,-10.375 -19.986,-11.439 -19.986,-11.932 J2.04
sigA15: EP4CE6.83 J4.05 | length 16.4
  TOP w0.3: EP4CE6.83 7.37,-8.99 9.315,-8.99 15.006,-14.681 J4.05
sigA16: EP4CE6.82 J4.04 | length 16.7
  BOTTOM w0.3: EP4CE6.82 8.68,-5.545 9.011,-5.876 9.011,-5.986 13.986,-10.961 21.07,-10.961 J4.04
sigA17: EP4CE6.17 J1.17 | length 18.1
  TOP w0.3: EP4CE6.17 -35.81,18.95 -30.2,18.95 -23.309,12.059 J1.17
sigA18: EP4CE6.16 J1.16 | length 18.1
  BOTTOM w0.3: EP4CE6.16 -27.73,15.95 -21.128,15.95 J1.16
sigA19: EP4CE6.80 J3.17 | length 30.6
  TOP w0.3: EP4CE6.80 12.25,-6.25 17.525,-6.25 20.888,-2.887 20.888,11.062 19.891,12.059 J3.17
sigA20: EP4CE6.77 J3.16 | length 36.6
  BOTTOM w0.3: EP4CE6.77 7.45,-1.45 10.05,-1.45 13.6,-5 16.875,-5 24.65,2.775 24.65,12.197 J3.16
sigA21: EP4CE6.13 J1.13 | length 18.1
  TOP w0.3: EP4CE6.13 -35.81,24.03 -29.755,24.03 -23.069,17.344 -22.521,17.344 J1.13
sigA22: EP4CE6.12 J1.12 | length 18.1
  BOTTOM w0.3: EP4CE6.12 -27.7,21 -21.098,21 J1.12
sigA23: EP4CE6.76 J3.13 | length 33.3
  TOP w0.3: EP4CE6.76 10.475,0.605 10.475,-0.3 14.125,-3.95 16.375,-3.95 17.525,-2.8 17.525,14.955 J3.13
sigA24: EP4CE6.48 J3.12 | length 37.1
  BOTTOM w0.3: EP4CE6.48 8.927,37.96 11.842,40.875 20.175,40.875 25.05,36 25.05,22.48 J3.12
sigA25: EP4CE6.9 J1.09 | length 18.1
  TOP w0.3: EP4CE6.9 -35.77,29.07 -30.395,29.07 -23.544,22.219 J1.09
sigA26: EP4CE6.8 J1.08 | length 18.1
  BOTTOM w0.3: EP4CE6.8 -27.645,26.025 -21.043,26.025 J1.08
sigA27: EP4CE6.55 J3.09 | length 33.6
  TOP w0.3: EP4CE6.55 7.45,29.11 9.189,29.11 10.576,30.497 10.576,33.753 10.75,33.927 10.75,36.153 10.72,36.183 11.787,37.25 15.976,37.25 17.36,35.866 17.36,24.567 J3.09
sigA28: EP4CE6.54 J3.08 | length 30.1
  BOTTOM w0.3: EP4CE6.54 10.156,31.816 10.156,34.036 10.41,34.29 10.41,36.467 11.713,37.77 16.705,37.77 17.675,36.8 17.675,27.375 19.075,25.975 21.032,25.975 J3.08
sigA29: EP4CE6.5 J1.05 | length 18.1
  TOP w0.3: EP4CE6.5 -35.73,34.11 -30.76,34.11 -23.949,27.299 J1.05
sigA30: EP4CE6.4 J1.04 | length 18.1
  BOTTOM w0.3: EP4CE6.4 -27.715,31.175 -21.35,31.175 -20.014,29.839 J1.04
sigA31: EP4CE6.51 J3.05 | length 26.5
  TOP w0.3: EP4CE6.51 7.37,34.11 8.985,34.11 9.42,34.438 ccw(c8.68,35.42) 9.88,35.69 9.88,35.733 9.88,36.531 11.439,38.09 11.984,38.55 17.025,38.55 18.45,37.125 18.45,28.557 J3.05
sigA32: EP4CE6.50 J3.04 | length 23.2
  BOTTOM w0.3: EP4CE6.50 8.68,35.745 9.334,36.399 9.334,36.759 11.675,39.1 19.525,39.1 21.025,37.6 21.025,31.062 J3.04
sigB1: EP4CE6.33 J2.15 | length 33.3
  SIGNALS w0.3: EP4CE6.33 -35.73,-1.45 -35.73,-13.968 J2.15
sigB2: EP4CE6.36 J2.18 | length 35.1
  BOTTOM w0.3: EP4CE6.36 -32.825,-4.355 -32.825,-19.8 -23.95,-28.675 -21.023,-28.675 J2.18
sigB3: EP4CE6.42 J4.15 | length 64.6
  5V w0.3: EP4CE6.42 -30.5,-6.3 -17.5,-6.3 -1.49,-22.31 ccw(c-0.27,-21.155) -1.425,-22.375 2.35,-26.15 18.182,-26.15 19.413,-27.381 J4.15
sigB4: EP4CE6.43 J4.18 | length 81.8
  5V w0.3: EP4CE6.43 -36.825,-13.055 -36.825,-23.725 -26.175,-34.375 23.756,-34.375 24.31,-33.821 24.31,-31.41 23.032,-30.132 22.461,-30.132 J4.18
sigB5: EP4CE6.29 J2.11 | length 35
  SIGNALS w0.3: EP4CE6.29 -35.81,3.71 -32.985,3.71 -30.825,1.55 -30.825,-13.793 J2.11
sigB6: EP4CE6.32 J2.14 | length 35.5
  BOTTOM w0.3: EP4CE6.32 -30.698,-1.402 -30.698,-17.527 -24.65,-23.575 -21.043,-23.575 J2.14
sigB7: EP4CE6.38 J4.11 | length 62.8
  5V w0.3: EP4CE6.38 -32.655,-3.375 -10.025,-3.375 8.901,-22.301 J4.11
sigB8: EP4CE6.39 J4.14 | length 102.3
  5V w0.3: EP4CE6.39 -39.35,-10.07 -39.35,-26.1 -29.175,-36.275 25.425,-36.275 26.95,-34.75 26.95,-29.541 J4.14
sigB9: EP4CE6.25 J2.07 | length 35.6
  SIGNALS w0.3: EP4CE6.25 -35.81,8.79 -32.015,8.79 -28.175,4.95 -28.175,-11.363 J2.07
sigB10: EP4CE6.28 J2.10 | length 35.5
  BOTTOM w0.3: EP4CE6.28 -28.625,1.605 -28.625,-14.6 -24.775,-18.45 -21.088,-18.45 J2.10
sigB11: EP4CE6.85 J4.07 | length 16.4
  TOP w0.3: EP4CE6.85 7.37,-11.53 9.38,-11.53 15.071,-17.221 J4.07
sigB12: EP4CE6.88 J4.10 | length 16.4
  BOTTOM w0.3: EP4CE6.88 14.421,-18.581 21.07,-18.581 J4.10
sigB13: EP4CE6.19 J2.03 | length 38.7
  SIGNALS w0.3: EP4CE6.19 -37.04,17.39 -36.174,16.524 -36.06,16.41 -31.21,16.41 -24.925,10.125 -24.925,-9.533 J2.03
sigB14: EP4CE6.22 J2.06 | length 37.3
  BOTTOM w0.3: EP4CE6.22 -25.8,6.4 -25.8,-11.075 -23.425,-13.45 -21.008,-13.45 J2.06
sigB15: EP4CE6.81 J4.03 | length 16.4
  TOP w0.3: EP4CE6.81 7.37,-6.45 9.45,-6.45 15.141,-12.141 J4.03
sigB16: EP4CE6.84 J4.06 | length 16.4
  BOTTOM w0.3: EP4CE6.84 14.421,-13.501 21.07,-13.501 J4.06
sigB17: EP4CE6.15 J1.15 | length 18.1
  TOP w0.3: EP4CE6.15 -35.81,21.49 -29.49,21.49 -22.599,14.599 J1.15
sigB18: EP4CE6.18 J1.18 | length 19.1
  BOTTOM w0.3: EP4CE6.18 -25.145,10.825 -21.01,10.825 J1.18
sigB19: EP4CE6.78 J3.15 | length 31.9
  TOP w0.3: EP4CE6.78 8.68,-0.33 13.276,-4.926 13.45,-5.1 16.875,-5.1 19.35,-2.625 19.35,6.575 18.528,7.397 18.528,13.419 J3.15
sigB20: EP4CE6.75 J3.18 | length 32.2
  BOTTOM w0.3: EP4CE6.75 7.45,1.09 9.536,1.09 14.36,-3.734 16.491,-3.734 23.65,3.425 23.65,10.657 J3.18
sigB21: EP4CE6.11 J1.11 | length 18.1
  TOP w0.3: EP4CE6.11 -35.81,26.57 -29.895,26.57 -23.209,19.884 -22.521,19.884 J1.11
sigB22: EP4CE6.14 J1.14 | length 18.1
  BOTTOM w0.3: EP4CE6.14 -27.69,18.45 -21.088,18.45 J1.14
sigB23: EP4CE6.47 J3.11 | length 41.9
  TOP w0.3: EP4CE6.47 7.43,39.25 9.95,39.25 11.45,40.75 19.625,40.75 25.725,34.65 25.725,23.65 23,20.925 21.825,20.925 21.812,20.912 20.942,20.912 J3.11
sigB24: EP4CE6.79 J3.14 | length 41.5
  BOTTOM w0.3: EP4CE6.79 7.385,-3.925 10.1,-3.925 12.6,-6.425 17.825,-6.425 25.75,1.5 25.75,13.637 J3.14
sigB25: EP4CE6.7 J1.07 | length 18.1
  TOP w0.3: EP4CE6.7 -35.73,31.57 -30.645,31.57 -23.834,24.759 J1.07
sigB26: EP4CE6.10 J1.10 | length 18.1
  BOTTOM w0.3: EP4CE6.10 -27.685,23.525 -21.083,23.525 J1.10
sigB27: EP4CE6.53 J3.07 | length 29.8
  TOP w0.3: EP4CE6.53 7.408,31.608 9.148,31.608 10.098,32.559 10.186,34.635 10.282,35.026 ccw(c8.68,35.42) 10.3,35.733 10.3,36.357 11.613,37.67 11.661,37.675 16.625,37.675 17.875,36.425 17.875,26.592 J3.07
sigB28: EP4CE6.56 J3.10 | length 33.6
  BOTTOM w0.3: EP4CE6.56 10.576,29.696 10.576,33.862 10.83,34.116 10.83,36.293 11.887,37.35 15.876,37.35 16.925,36.301 16.925,25.825 19.225,23.525 20.942,23.525 J3.10
sigB29: EP4CE6.3 J1.03 | length 18.1
  TOP w0.3: EP4CE6.3 -35.73,36.65 -33.5,36.65 -32.038,35.188 -28.912,35.188 -23.564,29.839 J1.03
sigB30: EP4CE6.6 J1.06 | length 18.1
  BOTTOM w0.3: EP4CE6.6 -27.68,28.6 -21.078,28.6 J1.06
sigB31: EP4CE6.49 J3.03 | length 25
  TOP w0.3: EP4CE6.49 7.362,36.642 7.45,36.73 8.68,36.73 ccw(c8.68,37.96) 9.479,37.025 12.432,39.55 18.15,39.55 21,36.7 21,31.13 J3.03
sigB32: EP4CE6.52 J3.06 | length 26.6
  BOTTOM w0.3: EP4CE6.52 8.68,33.154 9.99,34.464 9.99,36.641 11.674,38.325 17.525,38.325 18.425,37.425 18.425,29.25 19.075,28.6 20.947,28.6 J3.06
SYNC: DSync.02 EP4CE6.59 LINK_A.2 | length 33.2
  SIGNALS w0.3: DSync.02@-18.6,37.9 -15.1,34.4 -10.9,34.4 -1.4,24.9 1.42,24.9 3.6,22.72 EP4CE6.59
  BOTTOM w0.3: DSync.02@-18.6,37.9 -16.8,37.9 LINK_A.2
TXD: EP4CE6.65 nRF52480.15 T6.P$1 | length 21.2
  TOP w0.3: EP4CE6.65 7.37,13.87 7.37,7.051 8.251,6.17 9.53,6.17 10.1,5.6 10.1,2.875 T6.P$1 12.875,0.15 15.53,0.15 nRF52480.15
VBAT: J6.1 nRF52480.28 | length 3.7
  TOP w0.5: nRF52480.28 37.938,25.575 38.848,26.485 J6.1
VBUS_Feather: J6.3 nRF52480.26 VBUS_Jumper.2 | length 16.2
  TOP w0.5: nRF52480.26 35.899,20.519 39.276,20.519 VBUS_Jumper.2 39.3,23.502 41.225,25.427 41.225,25.463 41.361,25.599 41.361,29.425 J6.3
VDD: 5V_SEL.3 "PD SINK.3" | length 3.4
  TOP w0.5: 5V_SEL.3 34.715,-18.76 34.715,-22.13 34.721,-22.136
VS: 5VREG.IN C2.1 J1.02 J1.20 J2.02 J2.20 J3.02 J3.20 J4.02 J4.20 VS.+ VS_Jumper.2 | length 3.8
  TOP w0.5: v1(-26,-38) -25.93,-38.069 -25.93,-39.68 VS.+ ; v1(24.9,-16.275) 24.9,-16.14 25.301,-15.738 25.301,-15.024 25.559,-14.766 C2.1
VSINK: "PD SINK.14" VS_Jumper.1 | length 23.6
  TOP w2: VS_Jumper.1 6.963,-29.557 7.162,-29.756 7.527,-29.391 9.559,-29.391 9.575,-29.375
  5V w2: VS_Jumper.1 6.963,-29.557 7.162,-29.756 9.194,-29.756 9.575,-29.375
  SIGNALS w2: VS_Jumper.1 6.963,-29.557 7.162,-29.756 9.194,-29.756 9.575,-29.375
  BOTTOM w2: VS_Jumper.1 6.963,-29.557 7.162,-29.756 7.527,-29.391 9.559,-29.391 9.575,-29.375
pads on no net: "PD SINK.MH1" LINK_A. LINK_A.4 LINK_A.5 LINK_B. LINK_B.4 LINK_B.5 nRF52480.2@34.605,39.545 nRF52480.MH1

## Polygon pours and split planes (outlines as drawn)
GND on GND "GND" (solid, remove dead copper, pour order 8): -39.551,40.325 39.575,40.325 39.575,-40.275 -39.527,-40.275
VS on VS "VS" (solid, remove dead copper, pour order 0): -39.551,40.325 39.575,40.325 39.575,-40.275 -39.527,-40.275
5V on 5V "5V" (solid, remove dead copper, pour order 7): -39.551,40.325 39.575,40.325 39.575,-40.275 -39.527,-40.275
GND on BOTTOM "GND" (solid, remove dead copper, pour order 9): -39.551,40.325 39.575,40.325 39.575,-40.275 -39.527,-40.275
GND on TOP "GNDNet" (solid, remove dead copper, pour order 2): -39.551,40.325 39.575,40.325 39.575,-40.275 -39.527,-40.275

## Keep-outs
Keep-Out Layer:
  circle w0.5: c34.605,39.545 r2.105
  circle w0.5: c39.25,-35.5 r1.45
  circle w0.5: c-37,-35.5 r1.45
  circle w0.5: c-21,0 r1.45
  circle w0.5: c0,0 r1.45
  circle w0.5: c0,-21 r1.45
  circle w0.5: c0,21 r1.45
  lines w0.1: -42,36.775 -42,22.025 cw(c-42,21.025) -42,20.025 -42,1 cw(c-42,0) -42,-1 -42,-20 cw(c-42,-21) -42,-22 -42,-36.75 ccw(c-36.775,-36.775) -36.8,-42 ; -42,36.8 cw(c-36.775,36.775) -36.75,42 -22,42 20.025,42 ccw(c21.025,42) 22.025,42 36.775,42 cw(c36.75,36.775) 41.975,36.75 41.975,22 ccw(c41.975,21) 41.975,20 41.975,1 ccw(c41.975,0) 41.975,-1 41.975,-20.025 ccw(c41.975,-21.025) 41.975,-22.025 41.927,-39.256 cw(c39.245,-39.243) 39.233,-41.925 22,-42 ccw(c21,-42) 20,-42 1,-42 ccw(c0,-42) -1,-42 -20.025,-42 ccw(c-21.025,-42) -22.025,-42 -36.775,-42

## Other copper
BOTTOM:
  text "PCB by Ben Kazemi for MSD Group @ UCL" at -40.217,-39.55 h1 r270

## Silkscreen, mask and mechanical layers (free items; w line width, h text height)
Top Overlay:
  lines w0.2: 11.575,4.988 10.7,4.112 10.7,-9.425 14.2,-12.925 ; 12.15,11.35 12.15,11.325 11.575,10.75 11.575,-0.775 12.2,-1.4 ; 12.85,1.078 ccw(c12.85,0.125) 12.917,-0.826 ; 12.85,3.628 ccw(c12.85,2.675) 12.917,1.724 ; 12.85,6.128 ccw(c12.85,5.175) 12.917,4.224 ; 12.85,8.703 ccw(c12.85,7.75) 12.917,6.799 ; 12.85,11.153 ccw(c12.85,10.2) 12.917,9.249 ; 14.75,-8.3 14.2,-8.85 14.2,-17 14.85,-17.65 ; 25.625,-18.625 25.625,-19.5 26.275,-20.15 26.65,-20.15 33.1,-20.15 33.325,-20.375 33.325,-23.8 33.85,-24.325 ; 33.475,20.05 34.225,20.05 34.65,19.625 34.65,18.675 34.175,18.2 33.5,18.2 ; 34.65,19.15 38.61,19.15 ; 33.875,-29.6 40.7,-29.6 40.7,-23.375 33.875,-23.375 33.875,-29.6
  lines w2: -42,-2.016 ccw(c-42,0) -42,2.016
  text "RESET" at 17.125,35.25 h1
  text "D13" at 34.3,33.8 h1
  text "3V3" at 17,33.475 h1
  text "VBUS" at 33.2,31.425 h1
  text "Top" at -9.1,31.183 h1
  text "AREF" at 16.95,30.425 h1
  text "EN" at 35.05,29.35 h1
  text "GND" at 16.95,28.075 h1
  text "VBAT" at 33.125,27.55 h1
  text "Bottom" at -10.1,25.85 h1
  text "PD03" at 16.95,25.375 h1
  text "PD02" at 16.95,22.925 h1
  text "A2" at 16.95,20.025 h1
  text "A3" at 16.95,17.5 h1
  text "A4" at 16.95,14.95 h1
  text "D12" at 39.25,14.825 h1
  text "A5" at 16.95,12.35 h1
  text "D11" at 39.25,12.325 h1
  text "D10" at 39.25,9.9 h1
  text "D9" at 39.25,7.325 h1
  text "J3" at 20,7.3 h1
  text "J1" at -21.9,7.2 h1
  text "D6" at 39.25,4.725 h1
  text "D5" at 39.25,2.2 h1
  text "SCL" at 40.45,-1 h1 r90
  text "SDA" at 39.15,-2.85 h1
  text "PCB by Ben Kazemi for MSD Group @ UCL" at -40.392,-3.425 h1 r270
  text "TXD" at 14.575,-10.251 h1
  text "RXD" at 14.575,-11.919 h1
  text "MISO" at 14.575,-13.588 h1
  text "MOSI" at 14.575,-15.256 h1
  text "SCK" at 14.575,-16.925 h1
  text "5V" at 37.825,-25.375 h1 r90
  text "VDD" at 35.25,-26.375 h1 r90
  text "EXT_5V" at 40.333,-29.374 h1 r90
  text "VSink" at -2,-30.1 h1
  text "VS" at 0.625,-32.85 h1
  text "J2" at -22,-34.825 h1
  text "J4" at 20.175,-34.875 h1
  text "PD_VIN" at -10.917,-36.375 h1 r90
  text "PD_ALERT" at -8.392,-36.375 h1 r90
  text "PD_RESET" at -5.817,-36.375 h1 r90
  text "PD_GPIO" at -3.217,-36.375 h1 r90
Bottom Overlay:
  lines w2: -42,-2 ccw(c-42,0.016) -42,2.031
  text "DIO" at -26.5,41.25 h1 r180
  text "MS" at -31.1,41.175 h1 r180
  text "DSync" at -22.1,41.117 h1 r180
Bottom Mask:
  text "PCB by Ben Kazemi for MSD Group @ UCL" at -40.217,-39.55 h1 r270

## Text inside footprints (layer, text, board x,y; h text height)
nRF52480: Top Overlay "ANTENNA" at 30.571,-5.709 h1.52 r180
"PD SINK": Top Overlay "USB IN <--" at 30.2,-31.8 h1.1; Top Overlay "GND" at 14.446,-34.241 h1 r90